# Allegro board 4layer-Setup.brd
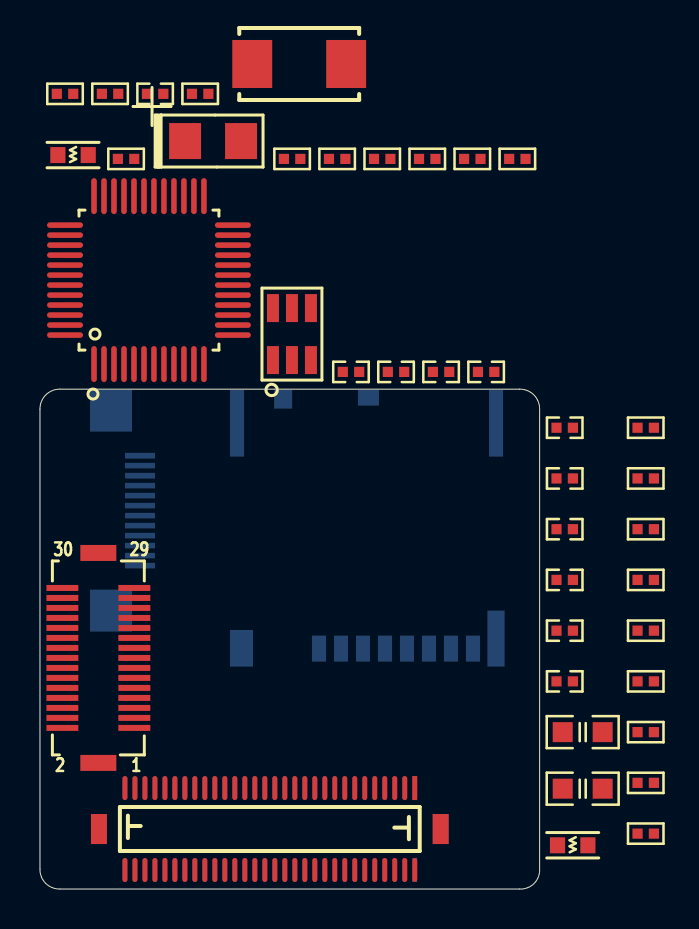
[diagram p0: board, top side]
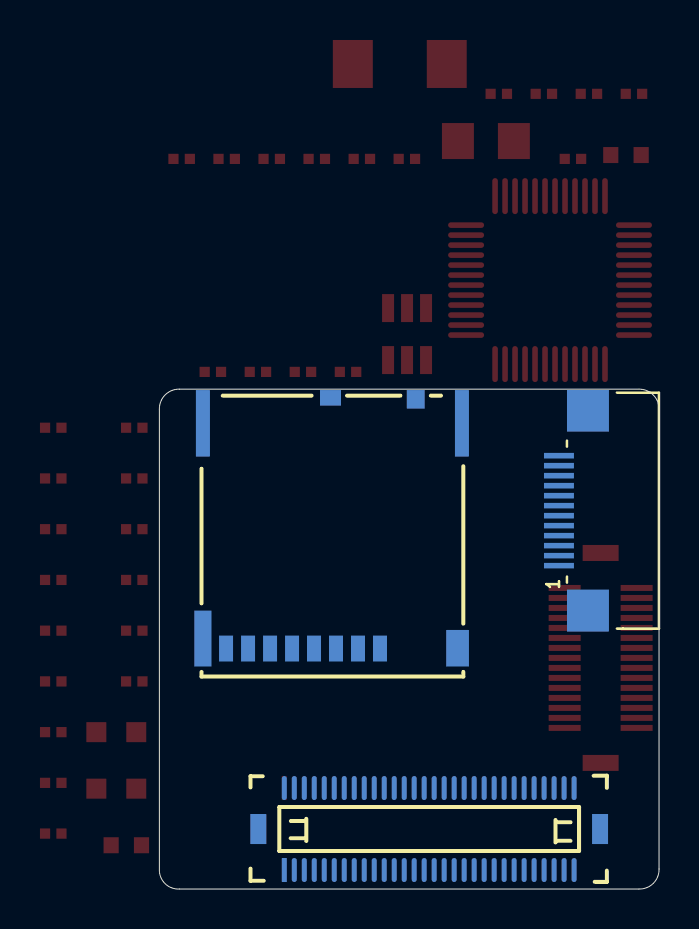
[diagram p1: board, bottom side, seen from below]

Outline 25 x 25 mm; copper layers: TOP, BOTTOM. Coordinates in mm from the lower left corner of the outline.
Outline path: 0,24 arc(0.29,24.71) 1,25 24,25 arc(24.71,24.71) 25,24 25,1 arc(24.72,0.28) 24,0 1,0 arc(0.28,0.28) 0,1 0,24

## Placement (name value [footprint] x y rotation side)
C1  22pF  [C_EIA0402]  5.76 39.77 0 top
C2  22pF  [C_EIA0402]  26.26 15.46 0 top
C3  10uF  [C_EIA0805]  27.16 7.85 0 top
C4  0.1uF  [C_EIA0402]  26.26 23.07 0 top
C5  0.1uF  [C_EIA0402]  26.26 20.53 0 top
C6  10uF  [C_EIA0805]  27.16 5.02 0 top
C7  0.1uF  [C_EIA0402]  26.26 18 0 top
C8  0.1uF  [C_EIA0402]  26.26 10.38 0 top
C9  22pF  [C_EIA0402]  15.56 25.86 0 top
C10  0.1uF  [C_EIA0402]  17.82 25.86 0 top
C11  0.1uF  [C_EIA0402]  20.07 25.86 0 top
C12  33uF  [C_1206]  8.66 37.41 0 top
C13  0.1uF  [C_EIA0402]  22.32 25.86 0 top
C14  0.1uF  [C_EIA0402]  26.26 12.92 0 top
J1  *  [DF12-30DS]  2.92 11.56 90 top
J2  *  [DF12-60DS]  11.5 3 270 top
J3  FFC/CON12  [12FLZ-SM2-TB]  3.56 18.92 90 bottom
J4  TF_CARD  [TFSLOT]  9.51 24.96 0 bottom
J5  *  [DF12-60DP]  11.5 3 90 bottom
L1  BLM18PG121SN1D  [L_EIA0603]  26.66 2.19 0 top
L2  BLM18PG121SN1D  [L_EIA0603]  1.65 36.71 0 top
R1  1K  [R_EIA0402]  4.31 36.52 0 top
R2  10K  [R_EIA0402]  30.31 15.46 0 top
R3  2.00K 1%  [R_EIA0402]  30.31 12.92 0 top
R4  5.1K  [R_EIA0402]  30.31 10.38 0 top
R5  5.1K  [R_EIA0402]  30.31 7.85 0 top
R6  5.1K  [R_EIA0402]  30.31 5.31 0 top
R7  5.1K  [R_EIA0402]  30.31 2.77 0 top
R8  5.1K  [R_EIA0402]  1.25 39.77 0 top
R9  5.1K  [R_EIA0402]  3.51 39.77 0 top
R10  21.5K 1%  [R_EIA0402]  14.87 36.52 0 top
R11  10K 1%  [R_EIA0402]  12.62 36.52 0 top
R12  51K  [R_EIA0402]  8.02 39.77 0 top
R13  51K  [R_EIA0402]  17.12 36.52 0 top
R14  51K  [R_EIA0402]  19.38 36.52 0 top
R15  51K  [R_EIA0402]  21.63 36.52 0 top
R16  1.0M  [R_EIA0402]  30.31 23.07 0 top
R17  NO POP  [R_EIA0402]  30.31 20.53 0 top
R18  51K  [R_EIA0402]  23.89 36.52 0 top
R19  10K  [R_EIA0402]  30.31 18 0 top
U1  *  [LQFP48]  5.45 30.45 0 top
U2  *  [SOT23-6]  12.61 27.75 0 top
Y1  25MHZ  [Y_ABM7]  12.97 41.26 0 top

## Library data of the parts
C1-C3 C6 C8 C9 C14 = CAP NP_1
C4 C5 C7 C10 C11 C13 = CAP NP_0
C12 = CAP_0
J1 = DF12-30DS_0
J2 = DF12-60DS_1
J3 = CON12_0
J4 = TF_SLOT_0
J5 = DF12-60DP_0
L1 L2 = INDUCTOR IRON_0
R1-R9 R12-R15 R18 = R_0
R10 R11 R16 R17 R19 = R_2
U1 = RTL8201CP_0
U2 = TPS3808_1
Y1 = CRYSTAL_0

## Footprints (pads in the part's own frame, mm; a bottom-side part is the same pattern mirrored in y, then rotated)
12FLZ-SM2-TB
  rect 2.1x2.1 smd: (-5,0) (5,0)
  rect 0.28x1.5 smd: 1(-2.75,1.45) 2(-2.25,1.45) 3(-1.75,1.45) 4(-1.25,1.45) 5(-0.75,1.45) 6(-0.25,1.45) 7(0.25,1.45) 8(0.75,1.45) 9(1.25,1.45) 10(1.75,1.45) 11(2.25,1.45) 12(2.75,1.45)
C_1206
  rect 1.6x1.8 smd: 1(-1.4,0) 2(1.4,0)
C_EIA0402
  rect 0.511x0.511 smd: 1(-0.41,0) 2(0.41,0)
C_EIA0805
  rect 1x1 smd: 1(-1,0) 2(1,0)
DF12-30DS
  rect 0.3x1.6 smd: 1(-3.5,-1.8) 2(-3.5,1.8) 3(-3,-1.8) 4(-3,1.8) 5(-2.5,-1.8) 6(-2.5,1.8) 7(-2,-1.8) 8(-2,1.8) 9(-1.5,-1.8) 10(-1.5,1.8) 11(-1,-1.8) 12(-1,1.8) 13(-0.5,-1.8) 14(-0.5,1.8) 15(0,-1.8) 16(0,1.8) 17(0.5,-1.8) 18(0.5,1.8) 19(1,-1.8) 20(1,1.8) 21(1.5,-1.8) 22(1.5,1.8) 23(2,-1.8) 24(2,1.8) 25(2.5,-1.8) 26(2.5,1.8) 27(3,-1.8) 28(3,1.8) 29(3.5,-1.8) 30(3.5,1.8)
  rect 0.8x1.8 smd: 31(-5.25,0) 32(5.25,0)
DF12-60DP
  rect 1.2x0.25 smd: 1(-2.05,7.25)
  oval 1.2x0.25 smd: 2(2.05,7.25) 3(-2.05,6.75) 4(2.05,6.75) 5(-2.05,6.25) 6(2.05,6.25) 7(-2.05,5.75) 8(2.05,5.75) 9(-2.05,5.25) 10(2.05,5.25) 11(-2.05,4.75) 12(2.05,4.75) 13(-2.05,4.25) 14(2.05,4.25) 15(-2.05,3.75) 16(2.05,3.75) 17(-2.05,3.25) 18(2.05,3.25) 19(-2.05,2.75) 20(2.05,2.75) 21(-2.05,2.25) 22(2.05,2.25) 23(-2.05,1.75) 24(2.05,1.75) 25(-2.05,1.25) 26(2.05,1.25) 27(-2.05,0.75) 28(2.05,0.75) 29(-2.05,0.25) 30(2.05,0.25) 31(-2.05,-0.25) 32(2.05,-0.25) 33(-2.05,-0.75) 34(2.05,-0.75) 35(-2.05,-1.25) 36(2.05,-1.25) 37(-2.05,-1.75) 38(2.05,-1.75) 39(-2.05,-2.25) 40(2.05,-2.25) 41(-2.05,-2.75) 42(2.05,-2.75) 43(-2.05,-3.25) 44(2.05,-3.25) 45(-2.05,-3.75) 46(2.05,-3.75) 47(-2.05,-4.25) 48(2.05,-4.25) 49(-2.05,-4.75) 50(2.05,-4.75) 51(-2.05,-5.25) 52(2.05,-5.25) 53(-2.05,-5.75) 54(2.05,-5.75) 55(-2.05,-6.25) 56(2.05,-6.25) 57(-2.05,-6.75) 58(2.05,-6.75) 59(-2.05,-7.25) 60(2.05,-7.25)
  rect 1.5x0.8 smd: 61(0,8.55) 62(0,-8.55)
DF12-60DS
  rect 1.2x0.25 smd: 1(-2.05,7.25)
  oval 1.2x0.25 smd: 2(2.05,7.25) 3(-2.05,6.75) 4(2.05,6.75) 5(-2.05,6.25) 6(2.05,6.25) 7(-2.05,5.75) 8(2.05,5.75) 9(-2.05,5.25) 10(2.05,5.25) 11(-2.05,4.75) 12(2.05,4.75) 13(-2.05,4.25) 14(2.05,4.25) 15(-2.05,3.75) 16(2.05,3.75) 17(-2.05,3.25) 18(2.05,3.25) 19(-2.05,2.75) 20(2.05,2.75) 21(-2.05,2.25) 22(2.05,2.25) 23(-2.05,1.75) 24(2.05,1.75) 25(-2.05,1.25) 26(2.05,1.25) 27(-2.05,0.75) 28(2.05,0.75) 29(-2.05,0.25) 30(2.05,0.25) 31(-2.05,-0.25) 32(2.05,-0.25) 33(-2.05,-0.75) 34(2.05,-0.75) 35(-2.05,-1.25) 36(2.05,-1.25) 37(-2.05,-1.75) 38(2.05,-1.75) 39(-2.05,-2.25) 40(2.05,-2.25) 41(-2.05,-2.75) 42(2.05,-2.75) 43(-2.05,-3.25) 44(2.05,-3.25) 45(-2.05,-3.75) 46(2.05,-3.75) 47(-2.05,-4.25) 48(2.05,-4.25) 49(-2.05,-4.75) 50(2.05,-4.75) 51(-2.05,-5.25) 52(2.05,-5.25) 53(-2.05,-5.75) 54(2.05,-5.75) 55(-2.05,-6.25) 56(2.05,-6.25) 57(-2.05,-6.75) 58(2.05,-6.75) 59(-2.05,-7.25) 60(2.05,-7.25)
  rect 1.5x0.8 smd: 61(0,8.55) 62(0,-8.55)
L_EIA0603
  rect 0.76x0.8 smd: 1(-0.76,0) 2(0.76,0)
LQFP48
  oval 0.28x1.8 smd: 1(-2.75,-4.2) 2(-2.25,-4.2) 3(-1.75,-4.2) 4(-1.25,-4.2) 5(-0.75,-4.2) 6(-0.25,-4.2) 7(0.25,-4.2) 8(0.75,-4.2) 9(1.25,-4.2) 10(1.75,-4.2) 11(2.25,-4.2) 12(2.75,-4.2) 25(2.75,4.2) 26(2.25,4.2) 27(1.75,4.2) 28(1.25,4.2) 29(0.75,4.2) 30(0.25,4.2) 31(-0.25,4.2) 32(-0.75,4.2) 33(-1.25,4.2) 34(-1.75,4.2) 35(-2.25,4.2) 36(-2.75,4.2)
  oval 1.8x0.28 smd: 13(4.2,-2.75) 14(4.2,-2.25) 15(4.2,-1.75) 16(4.2,-1.25) 17(4.2,-0.75) 18(4.2,-0.25) 19(4.2,0.25) 20(4.2,0.75) 21(4.2,1.25) 22(4.2,1.75) 23(4.2,2.25) 24(4.2,2.75) 37(-4.2,2.75) 38(-4.2,2.25) 39(-4.2,1.75) 40(-4.2,1.25) 41(-4.2,0.75) 42(-4.2,0.25) 43(-4.2,-0.25) 44(-4.2,-0.75) 45(-4.2,-1.25) 46(-4.2,-1.75) 47(-4.2,-2.25) 48(-4.2,-2.75)
R_EIA0402
  rect 0.511x0.511 smd: 1(-0.41,0) 2(0.41,0)
SOT23-6
  rect 0.6x1.4 smd: 1(-0.95,-1.3) 2(0,-1.3) 3(0.95,-1.3) 4(0.95,1.3) 5(0,1.3) 6(-0.95,1.3)
TFSLOT
  rect 0.7x1.3 smd: 1(4.45,12.93) 2(5.55,12.93) 3(6.65,12.93) 4(7.75,12.93) 5(8.85,12.93) 6(9.95,12.93) 7(11.05,12.93) 8(12.15,12.93)
  rect 0.7x3.33 smd: 9(13.31,1.665) 12(0.35,1.665)
  rect 1.05x0.78 smd: 10(6.925,0.39)
  rect 0.9x0.93 smd: 11(2.66,0.465)
  rect 1.14x1.83 smd: 13(0.57,12.915)
  rect 0.86x2.8 smd: 14(13.31,12.43)
Y_ABM7
  rect 1.999x2.4 smd: 1(-2.349,0) 2(2.349,0)

## Nets
DGND: C1.1 C2.1 C3.2 C4.2 C5.2 C6.2 C7.2 C8.2 C9.2 C10.2 C11.2 C12.2 C13.2 C14.2 J1.19 J1.20 J1.31 J1.32 J2.36 J2.37 J2.48 J2.50 J2.56 J2.61 J2.62 J4.6(VSS) J4.11(GND) J5.35 J5.38 J5.47 J5.49 J5.55 J5.61 J5.62 R2.2 R3.2 R4.2 R6.2 R7.2 R8.2 R9.2 R11.2 R16.2 U1.11(DGND#11) U1.17(DGND#17) U1.29(AGND#29) U1.35(AGND#35) U1.40(RPTR) U1.41(LDPS) U1.43(ISOLATE) U1.45(DGND#45) U2.2(GND)
VCC_1V1: J2.58 J2.60 J5.57 J5.59
VCC_1V2: J2.51 J2.53 J5.52 J5.54
VCC_1V8: J2.52 J2.54 J5.51 J5.53
VCC_3V3: C10.1 C11.1 C12.1 C13.1 C14.1 J2.47 J2.49 J4.4(VDD) J5.48 J5.50 L1.2 R1.2 R5.2 R10.1 R12.1 R13.1 R14.1 R15.1 R17.1 R18.1 R19.1 U1.14(DVDD33#14) U1.37(ANE) U1.38(DUPLEX) U1.39(SPEED) U1.48(DVDD33#48) U2.6(VDD)
VCC_5V: J2.39 J2.41 J5.40 J5.42
VCC_6V: J2.1 J2.3 J2.5 J5.2 J5.4 J5.6
VCC_CORE: J2.55 J2.57 J2.59 J5.56 J5.58 J5.60
A1_FOCUS+: J2.28 J5.27
A1_FOCUS-: J2.30 J5.29
A2_FOCUS+: J2.26 J5.25
A2_FOCUS-: J2.24 J5.23
C_SGND: J2.2 J2.4 J2.6 J5.1 J5.3 J5.5
DM368_RESETN: J2.7 R19.2 U2.1(R\E\S\E\T\)
JTAG_EMU0: J2.15 J3.6
JTAG_EMU1: J2.13 J3.5
JTAG_RTCK: J2.19 J3.8
JTAG_TCK: J2.17 J3.7
JTAG_TDI: J2.25 J3.11
JTAG_TDO: J2.21 J3.9
JTAG_TMS: J2.27 J3.12
JTAG_TRST: J2.23 J3.10
K1: J2.32 J5.31
K2: J2.34 J5.33
K3: J2.38 J5.37
K4: J2.40 J5.39
K5: J2.42 J5.41
K6: J2.44 J5.43
K7: J2.46 J5.45
LINE_OUT: J2.22 J3.3
MDC: J1.15 U1.25(MDC)
MDIO: J1.13 U1.26(MDIO)
MICN: J2.11 J3.2
MICP: J2.9 J3.1
MII_COL: J1.16 U1.1(COL)
MII_CRS: J1.18 U1.23(CRS)
MII_RXC: J1.10 U1.16(RXC)
MII_RXD0: J1.2 U1.21(RXD0)
MII_RXD1: J1.4 U1.20(RXD1)
MII_RXD2: J1.6 U1.19(RXD2)
MII_RXD3: J1.8 U1.18(RXD3)
MII_RXDV: J1.12 U1.22(RXDV)
MII_RXER: J1.14 R4.1 U1.24(RXER / FXEN)
MII_TXC: J1.9 U1.7(TXCLK)
MII_TXD0: J1.1 U1.6(TXD0)
MII_TXD1: J1.3 U1.5(TXD1)
MII_TXD2: J1.5 U1.4(TXD2)
MII_TXD3: J1.7 U1.3(TXD3)
MII_TXEN: J1.11 U1.2(TXEN)
NET_AVCC33: C3.1 C4.1 L1.1 U1.36(AVDD33)
NET_LED0: J5.24 R5.1 U1.9(LED0 / PHYAD0)
NET_LED1: R6.1 U1.10(LED1 / PHYAD1)
NET_LED2: R7.1 U1.12(LED2 / PHYAD2)
NET_LED3: J5.21 R8.1 U1.13(LED3 / PHYAD3)
NET_LED4: R9.1 U1.15(LED4 / PHYAD4)
NET_TPRX+: J5.20 U1.31(TPRX+)
NET_TPRX-: J5.22 U1.30(TPRX-)
NET_TPTX+: J5.26 U1.34(TPTX+)
NET_TPTX-: J5.28 U1.33(TPTX-)
PHY_PWFBIN: C7.1 L2.2 U1.8(PWFBIN)
PHY_PWFBOUT: C5.1 C6.1 L2.1 U1.32(PWFBOUT)
PHY_RESETN: J1.17 R2.1 U1.42(RESETN)
PHY_XI_25MHZ: C1.2 U1.46(XI) Y1.2
PHY_XO_25MHZ: C2.2 U1.47(XO) Y1.1
R1OUT: J2.31 J5.32
SD_CLK: C9.1 J1.23 J4.5(CLK) R14.2
SD_CMD: J1.25 J4.3(CMD) R15.2
SD_D0: J1.24 J4.7(DAT0) R13.2
SD_D1: J1.26 J4.8(DAT1) R12.2
SD_D2: J1.28 J4.1(DAT2) R18.2
SD_D3: J1.30 J4.2(CD/DAT3) R16.1 R17.2
SD_DETECT: J1.22 J4.10(CD_DETECT)
T1IN: J2.29 J5.30
TV_OUT: J2.10 J5.9
UART0_RXD: J2.35 J5.36
UART0_TXD: J2.33 J5.34
USB_DN: J2.18 J5.17
USB_DP: J2.16 J5.15
USB_ID: J2.14 J5.13
USB_VBUS: J2.20 J5.19
V_GND: J2.8 J5.7
N14412738: R1.1 U1.44(MII / SNIB)
N14412978: R3.1 U1.28(RTSET)
N16789111: R10.2 R11.1 U2.5(SENCE1)
N16789115: C8.1 U2.4(CT)

Pads without a net: J1 21 27 29; J2 12 43 45; J3 4; J4 9 12 13 14; J5 8 10 11 12 14 16 18 44 46; U1 27; U2 3

## Text on the board
NCLEGEND-1-4: FIGURE | SIZE | 8.0 | DRILL CHART: TOP to BOTTOM | ALL UNITS ARE IN MILS | PLATED | QTY | 191
